# Altium PCB PCB_meu1oarm_2022-08-20.pcbdoc (part 2 of 2)
Units mil, origin at the board's own origin, x right, y up, seen from the top; angles counter-clockwise.
Board outline 4310.32 x 3211.34 mil, 2 copper layers (Top Layer, Bottom Layer); 105 components, 150 nets, 526 pads, 319 vias.
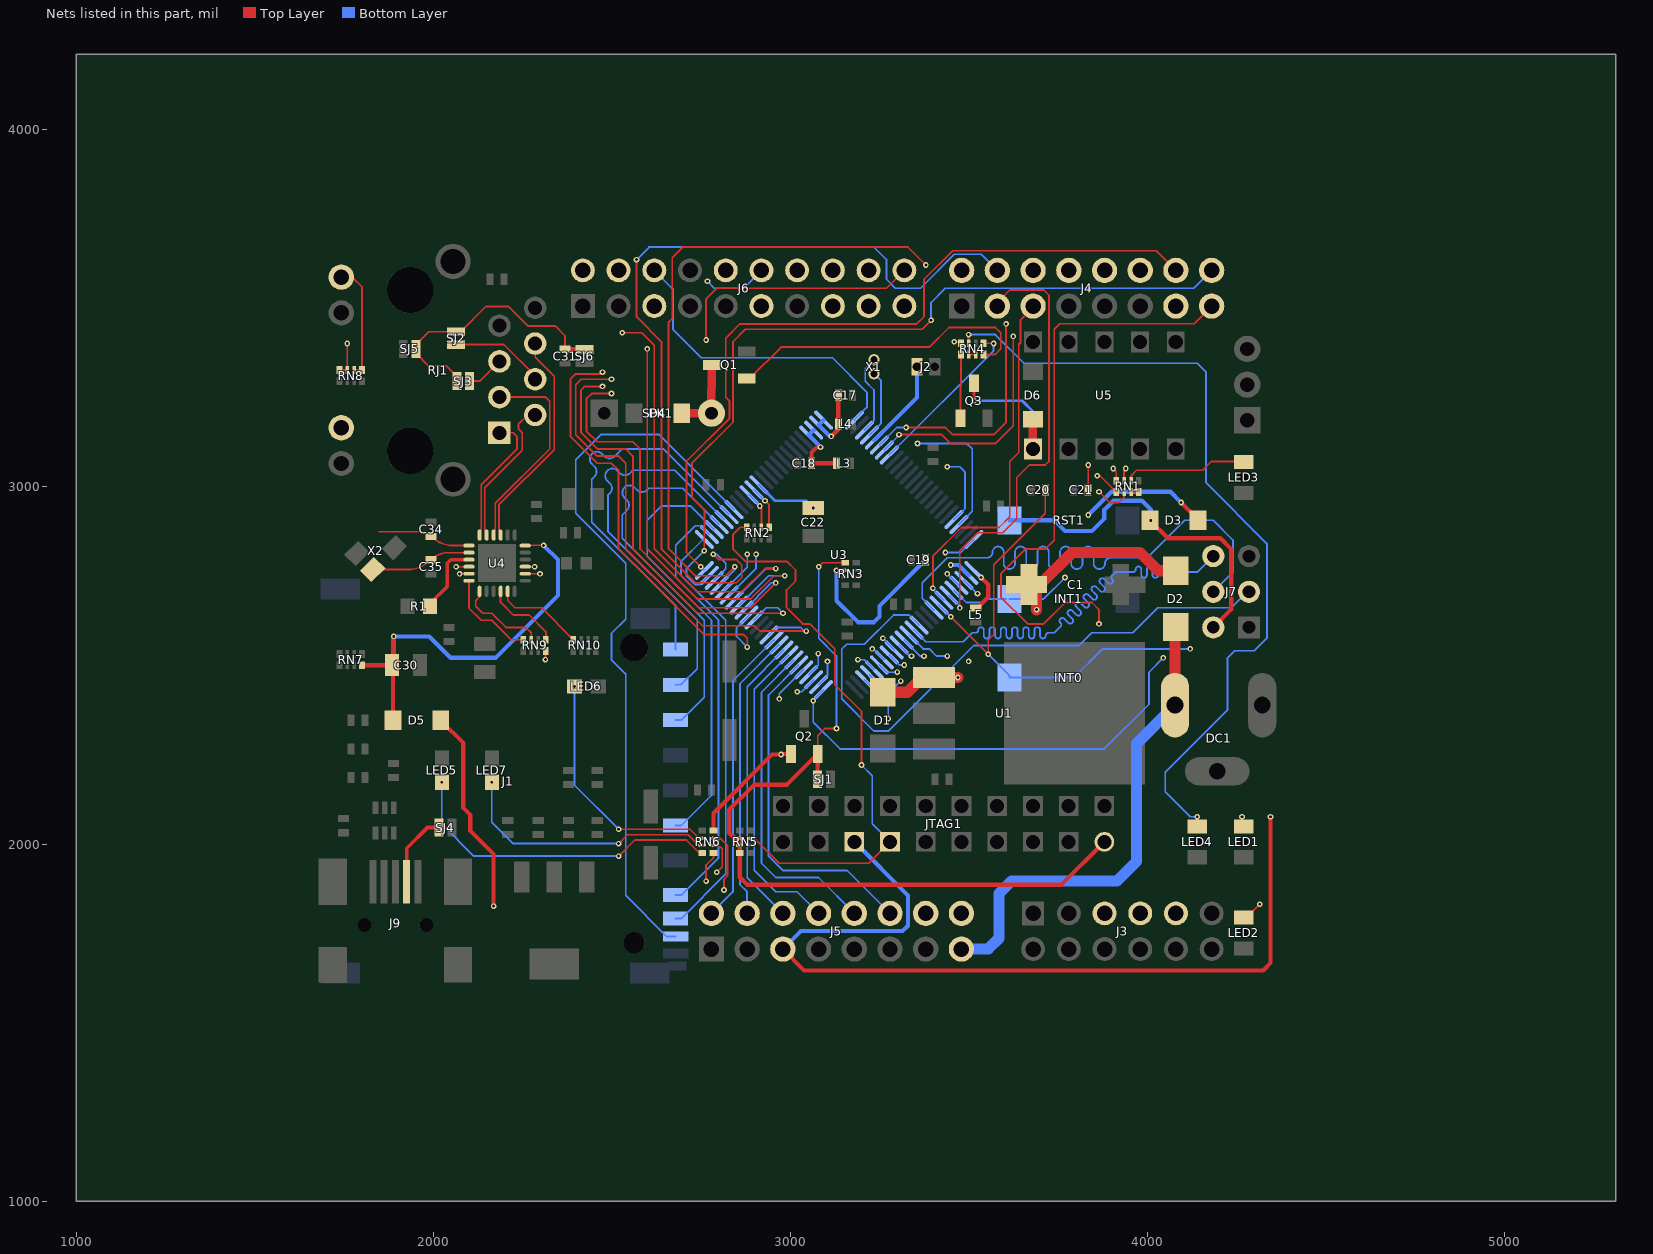
[diagram p2: the nets of this part, all layers, seen from the top]

## Via types
v1: diameter 15.75, hole 7.87, Top Layer to Bottom Layer, tented both sides, 310 vias
v2: diameter 23.62, hole 11.81, Top Layer to Bottom Layer, tented both sides, 7 vias
v3: diameter 24, hole 12, Top Layer to Bottom Layer, tented both sides, 2 vias

## Nets (pads, with @x,y where several pads share a name; then routed paths per layer and width w, separated by ;. In a path a pad name is that pad's centre, name@x,y a point inside that pad or via, vN(x,y) a via of type N, cw(c..) or ccw(c..) an arc to the next point about the centre after c; other vN are vias at no path point) (continued)
PTA16: U3.46 U4.20 | length 2069.4
  Top Layer w5: U4.20@2257.07,2756.84 v1(2298.47,2756.34)
  Mid-Layer 1 w5: v1(2298.47,2756.34) 2638.47,2756.34 2660.64,2778.52 ccw(c2655.08,2784.09) 2660.65,2789.66 cw(c2666.22,2795.22) 2671.78,2800.79 2677.35,2795.23 2682.92,2789.66 ccw(c2688.48,2795.24) 2694.05,2800.79 2688.49,2806.36 2682.92,2811.93 cw(c2688.5,2817.49) 2694.05,2823.06 2699.62,2817.5 ; 2699.63,2817.5 2705.19,2811.93 ccw(c2710.75,2817.51) 2716.32,2823.06 ; 2716.32,2845.34 ccw(c2710.76,2839.77) 2705.19,2834.2 2710.76,2828.63 2716.33,2823.06 ; 2716.33,2845.34 2721.89,2839.77 2727.46,2834.2 ccw(c2733.02,2839.78) 2738.6,2845.34 2733.03,2850.9 2727.46,2856.47 cw(c2733.04,2862.03) 2738.6,2867.61 2744.16,2862.04 2749.73,2856.47 ccw(c2755.29,2862.05) 2760.87,2867.61 2755.3,2873.17 2749.73,2878.74 cw(c2755.31,2884.3) 2760.87,2889.88 2766.43,2884.31 2772.01,2878.74 ccw(c2777.56,2884.32) 2783.14,2889.88 2777.57,2895.44 ; 2777.58,2895.45 2772.01,2901.01 cw(c2777.58,2906.57) 2783.14,2912.15 2788.7,2906.58 2794.28,2901.01 ; 2794.27,2901.01 ccw(c2799.83,2906.59) 2805.41,2912.15 2799.84,2917.72 2794.28,2923.28 ; 2794.27,2923.28 cw(c2799.85,2928.84) 2805.41,2934.42 2810.97,2928.85 2816.55,2923.28 ccw(c2822.1,2928.86) 2827.68,2934.42 2822.11,2939.99 2816.55,2945.55 cw(c2822.12,2951.11) 2827.68,2956.69 2833.25,2951.12 2838.82,2945.55 ccw(c2844.37,2951.13) 2849.95,2956.69 2844.38,2962.26 2838.82,2967.83 cw(c2844.39,2973.38) 2849.95,2978.96 2855.52,2973.39 2861.09,2967.83 ccw(c2866.66,2973.39) 2872.22,2978.96 2866.65,2984.53 2861.09,2990.1 cw(c2866.66,2995.66) 2872.22,3001.23 2877.79,2995.67 2883.36,2990.1 ccw(c2888.92,2995.68) 2894.49,3001.23 2888.92,3006.8 2883.36,3012.37 cw(c2888.94,3017.93) 2894.49,3023.5 2900.06,3017.94 2905.63,3012.37 ccw(c2911.19,3017.95) 2916.76,3023.5 2911.2,3029.07 2905.63,3034.64 cw(c2911.21,3040.2) 2916.77,3045.77 ccw(c2922.33,3051.34) 2927.9,3045.77 ; 2927.9,3045.78 2938.47,3056.34 v1(3438.78,3056.34)
  Bottom Layer w5: v1(3438.78,3056.34) 3473.47,3056.34 3488.47,3041.34 3488.47,2939.56 U3.46@3457.22,2908.32
PTA17: U3.47 U4.21 | length 2193.8
  Top Layer w5: U4.21@2257.07,2776.54 v1(2283.47,2776.34)
  Mid-Layer 1 w5: v1(2283.47,2776.34) 2343.47,2836.34 2346.51,2836.34 2588.47,2836.34 2595.64,2843.52 ccw(c2590.08,2849.09) 2595.65,2854.66 cw(c2601.23,2860.22) 2606.78,2865.79 2612.35,2860.23 2617.92,2854.66 ccw(c2623.48,2860.24) 2629.05,2865.79 2623.49,2871.36 2617.92,2876.93 cw(c2623.5,2882.49) 2629.06,2888.06 2634.62,2882.5 ; 2634.63,2882.5 2640.19,2876.93 ccw(c2645.75,2882.51) 2651.33,2888.07 2645.76,2893.63 2640.19,2899.2 cw(c2645.77,2904.76) 2651.33,2910.34 2656.89,2904.77 2662.46,2899.2 ccw(c2668.02,2904.78) 2673.6,2910.34 2668.03,2915.9 2662.46,2921.47 cw(c2668.03,2927.04) 2673.6,2932.61 2679.16,2927.04 2684.74,2921.47 ccw(c2690.29,2927.05) 2695.87,2932.61 2690.3,2938.18 2684.74,2943.74 cw(c2690.31,2949.3) 2695.87,2954.88 2701.43,2949.31 2707.01,2943.74 ccw(c2712.56,2949.32) 2718.14,2954.88 2712.57,2960.45 ; 2712.58,2960.45 2707.01,2966.01 cw(c2712.58,2971.57) 2718.14,2977.15 2723.71,2971.58 2729.28,2966.01 ; 2729.27,2966.01 ccw(c2734.83,2971.59) 2740.41,2977.15 2734.84,2982.72 2729.28,2988.29 cw(c2734.85,2993.84) 2740.41,2999.42 2745.98,2993.85 2751.55,2988.29 ccw(c2757.1,2993.86) 2762.68,2999.42 2757.11,3004.99 2751.55,3010.56 cw(c2757.12,3016.11) 2762.68,3021.69 2768.25,3016.12 2773.82,3010.56 ccw(c2779.37,3016.13) 2784.95,3021.69 2779.38,3027.26 2773.82,3032.83 cw(c2779.39,3038.39) 2784.95,3043.96 2790.52,3038.4 ; 2790.53,3038.4 2796.09,3032.83 ccw(c2801.65,3038.4) 2807.22,3043.96 2801.66,3049.53 2796.09,3055.1 cw(c2801.67,3060.66) 2807.22,3066.23 2812.79,3060.67 2818.36,3055.1 ccw(c2823.93,3060.67) 2829.49,3066.23 2823.93,3071.8 ; 2823.92,3071.8 2818.36,3077.37 cw(c2823.94,3082.93) 2829.5,3088.5 2835.06,3082.94 2840.63,3077.37 ccw(c2846.19,3082.95) 2851.77,3088.51 cw(c2857.33,3094.07) 2851.77,3099.64 2873.47,3121.34 3003.76,3121.34 3038.76,3086.34 3188.86,3086.34 3223.86,3121.34 v1(3355.32,3121.34)
  Bottom Layer w5: v1(3355.32,3121.34) 3493.47,3121.34 3508.47,3106.34 3508.47,2931.64 U3.47@3471.16,2894.34
PTA18: RN9.8 U3.50 | length 2140.7
  Top Layer w5: v1(2313.47,2516.34) 2313.47,2539.09 RN9.8@2314.96,2540.59
  Mid-Layer 1 w5: v1(2313.47,2516.34) 2313.47,2566.34 2273.47,2606.34 2188.47,2606.34 2158.47,2576.34 2158.47,2401.34 2298.47,2261.34 2878.47,2261.34 3124.71,2507.59 3124.71,2542.28 3138.77,2556.34 3170.46,2556.34 3173.77,2556.34 3258.76,2641.64 3258.76,2691.34 3285.47,2718.04 3335.16,2718.04 v1(3433.47,2816.34)
  Bottom Layer w5: v1(3433.47,2816.34) 3476.57,2816.34 U3.50@3512.89,2852.64
PTB0: U3.53 U4.10 | length 2289.1
  Top Layer w5: v1(2063.47,2776.34) 2099.39,2776.34 U4.10@2099.59,2776.54
  Mid-Layer 1 w5: v1(2063.47,2776.34) 2038.46,2751.34 2038.46,2416.34 2268.47,2186.34 3068.47,2186.34 3493.76,2611.64 3493.76,2671.64 v1(3523.47,2701.34)
  Bottom Layer w5: U3.53@3485.05,2738.5 3522.22,2701.34 v1(3523.47,2701.34)
PTB1: U3.54 U4.11 | length 2252.8
  Top Layer w5: v1(2073.47,2756.34) U4.11@2099.57,2756.84
  Mid-Layer 1 w5: v1(2073.47,2756.34) 2073.47,2431.34 2283.47,2221.34 2973.47,2221.34 3020.45,2268.32 ccw(c3014.88,2273.89) 3020.44,2279.45 cw(c3026.02,2285.01) 3031.58,2290.59 3037.15,2285.02 3042.71,2279.45 ccw(c3048.27,2285.03) 3053.85,2290.59 3048.28,2296.16 3042.71,2301.72 cw(c3048.29,2307.28) 3053.85,2312.86 3059.42,2307.29 3064.98,2301.72 ccw(c3070.54,2307.3) 3076.12,2312.86 3070.55,2318.43 3064.98,2323.99 cw(c3070.56,2329.55) 3076.12,2335.13 3081.69,2329.56 3087.25,2323.99 ccw(c3092.81,2329.57) 3098.39,2335.13 cw(c3103.96,2340.7) 3098.39,2346.27 3438.47,2686.34 v1(3438.47,2756.34)
  Bottom Layer w5: v1(3438.47,2756.34) U3.54@3471.16,2724.54
PTB2: C21.2 INT1.A J4.10 U3.55 | length 1340.5
  Top Layer w5: C21.2@3833.17,2991.34 v1(3833.47,3061.34)
  Mid-Layer 1 w5: v1(3833.47,3061.34) 3833.47,3560.74 J4.10@3878.97,3606.24
  Mid-Layer 2 w5: v1(3768.47,2746.34) 3768.47,3031.34 3798.47,3061.34 v1(3833.47,3061.34)
  Bottom Layer w5: U3.55@3457.22,2710.66 3491.56,2676.34 3538.47,2676.34 3548.47,2686.34 INT1.A@3602.97,2686.34 ; INT1.A@3613.11,2686.34 3708.47,2686.34 v1(3768.47,2746.34)
PTB3: J4.3 RN4.8 U3.56 | length 1463.3
  Top Layer w5: v1(3458.47,3406.34) 3472.71,3406.34 RN4.8@3476.97,3402.09 ; v1(3473.47,2661.34) 3473.47,2821.34 3523.47,2871.34 3593.47,2871.34 3633.47,2911.34 3633.47,3026.34 3668.47,3061.34 3713.47,3061.34 3723.47,3071.34 3723.47,3536.34 3708.47,3551.34 3613.47,3551.34 3578.96,3516.84 J4.3@3578.97,3506.24
  Mid-Layer 1 w5: v1(3458.47,3406.34) 3458.47,3426.34 3483.47,3451.34 3524.07,3451.34 J4.3@3578.97,3506.24
  Bottom Layer w5: U3.56@3443.3,2696.75 3473.47,2666.59 v1(3473.47,2661.34)
PTB9: J4.5 U3.57 | length 1016.7
  Top Layer w5: v1(3398.47,2716.34) 3398.47,2806.34 3478.47,2886.34 3583.47,2886.34 3613.47,2916.34 3613.47,3071.04 3638.76,3096.34 3638.76,3126.34 3638.76,3401.34 3643.47,3401.34 3643.47,3466.34 3678.96,3501.84 J4.5@3678.97,3506.24
  Bottom Layer w5: v1(3398.47,2716.34) 3398.47,2713.75 U3.57@3429.38,2682.83
PTB10: C20.2 INT0.A J4.12 U3.58 | length 2519.5
  Top Layer w5: v1(3448.47,2636.34) v1(3553.47,2531.34) 3553.47,2571.34 3568.76,2586.64 3568.76,2781.64 3713.17,2926.04 C20.2@3713.17,2991.34
  Mid-Layer 1 w5: J4.12@3978.97,3606.24 4023.86,3561.34 4098.47,3561.34 4128.76,3531.04 4128.76,3466.34 4118.76,3456.94 v1(4118.77,2546.34)
  Bottom Layer w5: U3.58@3415.46,2668.91 v1(3448.47,2636.34) ; v1(3553.47,2531.34) 3613.11,2471.69 INT0.A@3613.11,2466.34 3793.47,2466.34 3873.47,2546.34 v1(4118.77,2546.34)
PTB11: J7.4 U3.59 | length 1704.3
  Bottom Layer w5: U3.59@3401.57,2654.94 3368.47,2688.04 3368.47,2731.34 3438.47,2801.34 3549.47,2801.34 ; 3549.49,2801.34 ccw(c3549.49,2817.09) 3565.24,2817.09 cw(c3580.99,2817.09) 3596.74,2817.09 3596.74,2801.34 3596.74,2785.59 ccw(c3612.49,2785.59) 3628.24,2785.59 3628.24,2801.34 3628.24,2817.09 cw(c3643.98,2817.09) 3659.73,2817.09 3659.73,2801.34 3659.73,2785.59 ccw(c3675.48,2785.59) 3691.23,2785.59 3691.23,2801.34 ; 3691.22,2801.34 3691.23,2817.09 cw(c3706.98,2817.09) 3722.72,2817.09 3722.72,2801.34 3722.72,2785.59 ccw(c3738.47,2785.59) 3754.22,2785.59 3754.22,2801.34 3754.22,2817.09 cw(c3769.97,2817.09) 3785.72,2817.09 3785.72,2801.34 3785.72,2785.59 ccw(c3801.46,2785.59) 3817.21,2785.59 3817.21,2801.34 3817.21,2817.09 cw(c3832.96,2817.09) 3848.71,2817.09 3848.71,2801.34 3848.71,2785.59 ccw(c3864.46,2785.59) 3880.2,2785.59 cw(c3895.95,2785.59) 3895.95,2801.34 3998.47,2801.34 4103.47,2906.34 4183.47,2906.34 4238.47,2851.34 4238.47,2761.34 J7.4@4183.47,2706.34
PTB16: J7.3 U3.62 | length 1745.9
  Bottom Layer w5: U3.62@3359.78,2613.23 3331.66,2641.34 3288.47,2641.34 3206.66,2559.54 3156.97,2559.54 3143.47,2546.04 3143.47,2406.34 3233.47,2316.34 3273.47,2316.34 3513.47,2556.34 3808.47,2556.34 3843.47,2591.34 3958.47,2591.34 4028.47,2661.34 4233.47,2661.34 4278.47,2706.34 J7.3@4283.47,2706.34
PTB17: J7.6 U3.63 | length 1746.5
  Bottom Layer w5: U3.63@3345.86,2599.31 3378.47,2566.34 3483.47,2566.34 3508.47,2591.34 3517.45,2591.34 ccw(c3517.45,2599.21) 3525.32,2599.21 cw(c3533.2,2599.21) 3541.07,2599.21 3541.08,2591.34 ; 3541.07,2591.34 3541.07,2583.47 ccw(c3548.95,2583.47) 3556.82,2583.47 3556.82,2591.34 3556.82,2599.21 cw(c3564.69,2599.21) 3572.57,2599.21 3572.57,2591.34 3572.57,2583.47 ccw(c3580.44,2583.47) 3588.31,2583.47 3588.31,2591.34 3588.31,2599.21 cw(c3596.19,2599.21) 3604.06,2599.21 3604.07,2591.34 3604.06,2583.47 ccw(c3611.94,2583.47) 3619.81,2583.47 3619.81,2591.34 3619.81,2599.21 cw(c3627.68,2599.21) 3635.56,2599.21 3635.55,2591.34 3635.56,2583.47 ccw(c3643.43,2583.47) 3651.31,2583.47 3651.31,2591.34 3651.31,2599.21 cw(c3659.18,2599.21) 3667.05,2599.21 3667.05,2591.34 3667.05,2583.47 ccw(c3674.93,2583.47) 3682.8,2583.47 3682.81,2591.34 3682.8,2599.21 cw(c3690.68,2599.21) 3698.55,2599.21 3698.55,2591.34 3698.55,2583.47 ccw(c3706.43,2583.47) 3714.3,2583.47 cw(c3722.17,2583.47) 3722.18,2591.34 3738.47,2591.34 3755.55,2608.43 ccw(c3749.99,2614) 3755.55,2619.56 cw(c3761.13,2625.12) 3766.69,2630.7 3772.25,2625.13 3777.82,2619.56 ccw(c3783.38,2625.14) 3788.96,2630.7 3783.39,2636.27 3777.82,2641.83 cw(c3783.4,2647.39) 3788.96,2652.97 3794.53,2647.4 3800.1,2641.83 ccw(c3805.65,2647.41) 3811.23,2652.97 3805.66,2658.54 3800.1,2664.11 cw(c3805.67,2669.66) 3811.23,2675.24 3816.8,2669.67 3822.37,2664.11 ccw(c3827.93,2669.67) 3833.5,2675.24 3827.93,2680.81 3822.37,2686.38 cw(c3827.94,2691.93) 3833.5,2697.51 3839.07,2691.94 3844.64,2686.38 ccw(c3850.2,2691.95) 3855.77,2697.51 ; 3855.77,2719.78 ccw(c3850.21,2714.21) 3844.64,2708.65 3850.2,2703.08 3855.78,2697.51 ; 3855.78,2719.78 3861.34,2714.22 3866.91,2708.65 ccw(c3872.47,2714.23) 3878.04,2719.78 3872.47,2725.35 3866.91,2730.92 cw(c3872.49,2736.48) 3878.04,2742.05 3883.61,2736.49 3889.18,2730.92 ccw(c3894.74,2736.5) 3900.31,2742.05 cw(c3905.88,2747.62) 3900.31,2753.19 3908.47,2761.34 3958.18,2761.34 ccw(c3958.17,2769.21) 3966.05,2769.21 cw(c3973.92,2769.21) 3981.79,2769.21 3981.8,2761.34 3981.8,2753.47 ccw(c3989.67,2753.47) 3997.54,2753.47 3997.54,2761.34 3997.54,2769.21 cw(c4005.42,2769.21) 4013.29,2769.21 4013.29,2761.34 4013.29,2753.47 ccw(c4021.16,2753.47) 4029.04,2753.47 4029.04,2761.34 4029.04,2769.21 cw(c4036.91,2769.21) 4044.79,2769.21 4044.79,2761.34 4044.79,2753.47 ccw(c4052.66,2753.47) 4060.53,2753.47 4060.53,2761.34 4060.53,2769.21 cw(c4068.41,2769.21) 4076.28,2769.21 4076.28,2761.34 4076.28,2753.47 ccw(c4084.16,2753.47) 4092.03,2753.47 4092.03,2761.34 4092.03,2769.21 cw(c4099.9,2769.21) 4107.78,2769.21 ccw(c4115.65,2769.21) 4115.65,2761.34 4138.47,2761.34 J7.6@4183.47,2806.34
PTB18: RN6.2 U3.64 | length 1392.8
  Top Layer w5: RN6.2@2784.22,1996.5 2798.3,1996.5 2808.47,1986.34 2808.47,1936.34 v1(2793.47,1921.34)
  Mid-Layer 1 w5: v1(2793.47,1921.34) 3288.47,1921.34 3328.47,1961.34 3328.47,2416.34 v1(3438.47,2526.34)
  Bottom Layer w5: U3.64@3331.95,2585.39 3370.99,2546.34 3388.47,2546.34 3408.47,2526.34 v1(3438.47,2526.34)
PTB19: RN6.3 U3.65 | length 1673.2
  Top Layer w5: RN6.3@2784.22,2016.18 2803.63,2016.18 2823.47,1996.34 2823.47,1911.34 2813.47,1901.34 v1(2813.47,1871.34)
  Mid-Layer 1 w5: v1(2813.47,1871.34) 2838.47,1896.34 3368.47,1896.34 3428.47,1956.34 3428.47,2476.34 3463.47,2511.34 v1(3498.47,2511.34)
  Mid-Layer 2 w5: v1(3373.47,2526.34) 3373.47,2546.34 3383.47,2556.34 3453.47,2556.34 v1(3498.47,2511.34)
  Bottom Layer w5: U3.65@3318.02,2571.47 3363.17,2526.34 v1(3373.47,2526.34)
PTB20: J3.7 U3.66 | length 1548.7
  Mid-Layer 2 w5: v1(3338.47,2526.34) 3378.47,2486.34 3648.47,2486.34 3798.47,2636.34 3873.47,2636.34 3945.47,2564.34 3945.47,1872.44 J3.7@3879.01,1806.03
  Bottom Layer w5: U3.66@3304.09,2557.55 3335.31,2526.34 v1(3338.47,2526.34)
PTB21: J3.5 U3.67 | length 1604.2
  Mid-Layer 2 w5: v1(3258.47,2576.34) 3698.47,2576.34 3783.47,2661.34 3883.47,2661.34 3972.77,2572.04 3972.77,1806.04 J3.5@3979.01,1806.03
  Bottom Layer w5: v1(3258.47,2576.34) U3.67@3290.18,2543.63
PTB22: J3.3 U3.68 | length 1834.4
  Mid-Layer 2 w5: v1(3318.47,2501.34) 3303.47,2501.34 3238.47,2566.34 3238.47,2591.34 3253.47,2606.34 3693.47,2606.34 3773.47,2686.34 3888.47,2686.34 4000.07,2574.74 4000.07,1885.04 J3.3@4079.01,1806.03
  Bottom Layer w5: U3.68@3276.26,2529.71 3304.63,2501.34 v1(3318.47,2501.34)
PTB23: RN6.1 U3.69 | length 1225.2
  Top Layer w5: v1(2763.47,1896.34) 2763.47,1941.34 2784.22,1962.09 RN6.1@2784.22,1974.84
  Mid-Layer 2 w5: v1(2763.47,1896.34) 3188.47,1896.34 3228.47,1936.34 v1(3228.47,2546.34)
  Bottom Layer w5: v1(3228.47,2546.34) 3231.8,2546.34 U3.69@3262.34,2515.79
PTC0: J4.15 U3.70 | length 2407.1
  Top Layer w5: v1(3863.47,2616.34) 3863.56,2656.54 3843.86,2676.34 3768.76,2676.34 3708.76,2616.34 3663.76,2616.34 3588.76,2691.34 3588.76,2756.34 3658.76,2826.34 3713.76,2826.34 3738.47,2851.04 3738.47,3441.34 3753.47,3456.34 4129.96,3457.24 J4.15@4178.97,3506.24
  Mid-Layer 2 w5: v1(3298.47,2481.34) 3358.47,2481.34 3403.47,2436.34 3648.47,2436.34 3828.47,2616.34 v1(3863.47,2616.34)
  Bottom Layer w5: U3.70@3248.42,2501.87 3268.96,2481.34 v1(3298.47,2481.34)
PTC1: J6.5 U3.71 | length 1807
  Mid-Layer 2 w5: J6.5@2618.47,3506.24 2618.47,3436.34 2638.47,3416.34 2638.47,3346.34 2618.47,3326.34 2618.47,3166.34 2698.47,3086.34 2878.47,3086.34 3008.47,2956.34 3008.47,2716.34 2953.47,2661.34 2953.47,2471.34 2998.47,2426.34 2998.47,2401.34 3033.47,2366.34 3128.47,2366.34 3188.47,2426.34 v1(3188.47,2516.34)
  Bottom Layer w5: v1(3188.47,2516.34) 3206.12,2516.34 U3.71@3234.51,2487.95
PTC2: J5.16 U3.72 | length 899.4
  Mid-Layer 2 w5: v1(3308.47,2456.34) 3358.47,2456.34 3528.76,2286.04 3528.76,1856.44 J5.16@3478.36,1806.04
  Bottom Layer w5: U3.72@3220.58,2474.03 3253.26,2441.34 3293.47,2441.34 v1(3308.47,2456.34)
PTC3: J5.14 U3.73 | length 745.9
  Mid-Layer 2 w5: v1(3273.47,2351.34) 3308.86,2351.34 3327.87,2332.33 3327.87,1856.53 J5.14@3378.36,1806.04
  Bottom Layer w5: U3.73@3206.67,2460.12 3273.47,2393.33 v1(3273.47,2351.34)
PTC4: J4.13 U3.76 | length 2284.4
  Mid-Layer 1 w5: v1(4043.47,2521.34) 4043.47,3011.34 4028.47,3026.34 4028.47,3455.74 J4.13@4078.97,3506.24
  Bottom Layer w5: U3.76@3092.53,2432.28 3063.47,2403.21 v1(3063.47,2401.34) 3063.47,2341.34 3138.47,2266.34 3878.47,2266.34 4003.47,2391.34 4003.47,2481.34 v1(4043.47,2521.34)
PTC5: J6.10 U3.77 | length 1640.6
  Mid-Layer 2 w5: J6.10@2818.47,3606.24 2868.47,3556.24 2868.47,3446.34 2919.87,3394.94 ccw(c2925.43,3400.51) 2931,3394.94 cw(c2936.56,3389.36) 2942.14,3383.8 2936.57,3378.24 2931,3372.67 ccw(c2936.58,3367.11) 2942.14,3361.53 2947.7,3367.1 2953.27,3372.67 cw(c2958.83,3367.09) 2964.41,3361.53 2958.84,3355.97 2953.27,3350.4 ccw(c2958.85,3344.84) 2964.41,3339.26 2969.97,3344.83 2975.54,3350.4 cw(c2981.1,3344.82) 2986.68,3339.26 2981.11,3333.7 2975.54,3328.13 ccw(c2981.11,3322.56) 2986.68,3316.99 2992.24,3322.56 2997.82,3328.13 cw(c3003.37,3322.55) 3008.95,3316.99 3003.38,3311.42 2997.82,3305.86 ccw(c3003.39,3300.3) 3008.95,3294.72 3014.51,3300.29 3020.09,3305.86 cw(c3025.64,3300.28) 3031.22,3294.72 3025.65,3289.15 3020.09,3283.59 ccw(c3025.66,3278.03) 3031.22,3272.45 3036.79,3278.02 3042.36,3283.59 cw(c3047.91,3278.01) 3053.49,3272.45 3047.92,3266.88 3042.36,3261.31 ccw(c3047.93,3255.76) 3053.49,3250.18 3059.06,3255.75 3064.63,3261.31 cw(c3070.18,3255.74) 3075.76,3250.18 ccw(c3081.33,3244.61) 3075.76,3239.04 3103.47,3211.34 3103.47,3184.84 3102.26,3184.84 3058.76,3141.34 3058.76,3106.34 3103.47,3061.64 v1(3103.47,2511.34)
  Bottom Layer w5: U3.77@3078.62,2446.19 3103.47,2471.04 v1(3103.47,2511.34)
PTC6: J6.14 U3.78 | length 1648.4
  Mid-Layer 2 w5: v1(3018.47,2426.34) 3018.47,2406.34 3043.47,2381.34 3093.47,2381.34 3118.76,2406.64 3118.76,2481.34 3143.76,2506.34 3143.76,2531.34 3153.37,2540.94 3178.37,2540.94 3193.47,2556.04 3193.47,2616.34 3168.47,2641.34 3168.47,3102.24 3183.76,3117.64 3183.76,3176.34 3168.47,3191.64 3168.47,3361.34 3150.27,3379.54 cw(c3155.82,3385.12) 3150.25,3390.69 ccw(c3144.67,3396.25) 3139.11,3401.83 3133.54,3396.26 3127.98,3390.69 cw(c3122.42,3396.27) 3116.84,3401.83 3122.41,3407.39 3127.98,3412.96 ccw(c3122.4,3418.52) 3116.84,3424.1 3111.27,3418.53 3105.71,3412.96 cw(c3100.15,3418.54) 3094.57,3424.1 3100.14,3429.67 3105.71,3435.23 ccw(c3100.13,3440.79) 3094.57,3446.37 cw(c3089,3451.94) 3083.43,3446.37 3068.47,3461.34 3068.47,3556.24 J6.14@3018.47,3606.24
  Bottom Layer w5: v1(3018.47,2426.34) 3030.92,2426.34 U3.78@3064.7,2460.12
PTC7: J6.12 U3.79 | length 1561.9
  Mid-Layer 2 w5: v1(2767.36,3575.55) 2767.37,3465.74 2790.16,3442.94 ; 2790.17,3442.9 ccw(c2795.74,3448.47) 2801.31,3442.9 cw(c2806.88,3437.33) 2812.44,3431.76 2806.88,3426.19 ; 2806.87,3426.19 2801.31,3420.63 ccw(c2806.88,3415.06) 2812.44,3409.49 2818.01,3415.06 2823.58,3420.63 cw(c2829.15,3415.06) 2834.72,3409.49 2829.15,3403.92 2823.58,3398.35 ccw(c2829.2,3392.84) 2834.72,3387.22 2840.28,3392.79 2845.85,3398.35 cw(c2851.41,3392.78) 2856.99,3387.22 2851.42,3381.65 2845.85,3376.08 ccw(c2851.47,3370.57) 2856.99,3364.95 cw(c2862.55,3359.38) 2868.12,3364.95 ; 2868.17,3364.94 3027.77,3205.34 3027.77,2762.34 3073.76,2716.34 3073.76,2536.74 v1@3077.37,2533.14
  Bottom Layer w5: v1@2767.37,3575.54 2786.57,3556.34 2868.56,3556.34 J6.12@2918.47,3606.24 ; U3.79@3050.78,2474.03 3077.36,2500.61 v1(3077.36,2533.15)
PTC8: J6.16 U3.80 | length 1640.8
  Mid-Layer 2 w5: v1(2968.47,2406.34) 3028.47,2346.34 3153.47,2346.34 3208.47,2401.34 3208.47,3411.34 3168.47,3451.34 3168.47,3556.24 J6.16@3118.47,3606.24
  Bottom Layer w5: v1(2968.47,2406.34) 2968.47,2421.34 3035.09,2487.96 U3.80@3036.86,2487.95
PTC9: J5.12 U3.81 | length 976.8
  Bottom Layer w5: U3.81@3022.94,2501.87 2938.47,2417.39 2938.47,1966.34 2978.47,1926.34 3158.07,1926.34 J5.12@3278.36,1806.04
PTC10: J5.10 U3.82 | length 925
  Bottom Layer w5: U3.82@3009.07,2515.84 2918.47,2425.24 2918.47,1946.34 2958.47,1906.34 3078.07,1906.34 J5.10@3178.36,1806.04
PTC11: J5.8 U3.83 | length 873.1
  Bottom Layer w5: U3.83@2995.1,2529.71 2898.47,2433.04 2898.47,1926.34 2958.47,1866.34 3018.07,1866.34 J5.8@3078.36,1806.04
PTC12: J5.6 U3.84 | length 821.5
  Bottom Layer w5: J5.6@2978.36,1806.04 2878.47,1905.94 2878.47,2440.94 U3.84@2981.18,2543.63
PTC13: J5.4 U3.85 | length 804.8
  Bottom Layer w5: J5.4@2878.36,1806.04 2878.37,1866.44 2858.47,1886.44 2858.47,2448.74 U3.85@2967.26,2557.55
PTC14: J5.2 U3.86 | length 837.9
  Bottom Layer w5: J5.2@2778.36,1806.04 2838.47,1866.14 2838.47,2456.64 U3.86@2953.37,2571.44
PTC15: J6.15 U3.87 | length 2215.8
  Top Layer w5: v1(2498.47,3301.34) 2413.47,3301.34 2398.47,3286.34 2398.47,3146.34 2458.47,3086.34 2518.47,3086.34 2538.47,3066.34 2538.47,2826.34 2753.37,2611.44 2898.76,2611.34 2913.66,2596.44 v1(3043.78,2596.34)
  Mid-Layer 1 w5: v1(2498.47,3301.34) 2528.47,3301.34 2558.47,3331.34 2558.47,3426.34 2578.47,3446.34 2653.47,3446.34 2668.47,3461.34 2668.47,3531.34 2688.47,3551.34 3073.37,3551.34 J6.15@3118.47,3506.24
  Bottom Layer w5: U3.87@2939.47,2585.44 2960.36,2606.34 3028.37,2606.34 3038.37,2596.34 v1(3043.78,2596.34)
PTC16: J6.17 RN1.1 U3.90 | length 3436.6
  Top Layer w5: v1(2473.47,3281.34) 2423.47,3281.34 2413.47,3271.34 2413.47,3151.34 2458.47,3106.34 2538.47,3106.34 2558.47,3086.34 2558.47,2826.34 2738.47,2646.34 v1(2978.78,2646.34) ; v1(3858.47,3031.34) 3866.21,3031.34 RN1.1@3911.97,2985.59
  Mid-Layer 1 w5: v1(2473.47,3281.34) 2443.47,3281.34 2413.47,3251.34 2413.47,3151.34 2443.47,3121.34 2568.47,3121.34 2838.47,3391.34 3103.56,3391.34 J6.17@3218.47,3506.24 3273.56,3561.34 3363.47,3561.34 3423.47,3501.34 3423.47,3406.34 3593.47,3236.34 3668.47,3236.34 3738.47,3166.34 3738.47,3056.34 3763.47,3031.34 v1(3858.47,3031.34)
  Bottom Layer w5: U3.90@2897.66,2627.15 2931.85,2661.34 2963.77,2661.34 v1(2978.78,2646.34)
PTC17: J6.19 RN1.2 U3.91 | length 3626.9
  Top Layer w5: v1(2473.47,3321.34) 2468.47,3316.34 2398.47,3316.34 2383.47,3301.34 2383.47,3141.34 2458.47,3066.34 2498.47,3066.34 2518.47,3046.34 2518.47,2826.34 2758.47,2586.34 2868.47,2586.34 2878.47,2576.34 v1(2878.47,2551.34) ; v1(3863.47,2986.34) 3893.47,2956.34 3918.47,2956.34 3933.66,2971.54 RN1.2@3933.66,2985.64
  Mid-Layer 1 w5: v1(2473.47,3321.34) 2443.47,3321.34 2383.47,3261.34 2383.47,3141.34 2433.47,3091.34 2573.47,3091.34 2833.47,3351.34 3163.56,3351.34 J6.19@3318.47,3506.24 3318.47,3441.34 3363.47,3396.34 3403.47,3396.34 3583.47,3216.34 3658.47,3216.34 3718.47,3156.34 3718.47,3026.34 3793.47,2951.34 3828.47,2951.34 v1(3863.47,2986.34)
  Bottom Layer w5: v1(2878.47,2551.34) 2848.47,2581.34 2848.47,2605.8 U3.91@2883.74,2641.07
PTC18: J6.11 U3.92 | length 1736
  Top Layer w5: v1(2498.47,3261.34) 2443.47,3261.34 2428.47,3246.34 2428.47,3156.34 2458.47,3126.34 2558.47,3126.34 2578.47,3106.34 2578.47,2826.34 2743.47,2661.34 2888.47,2661.34 v1(2958.47,2731.34)
  Mid-Layer 1 w5: v1(2498.47,3261.34) 2673.56,3261.34 J6.11@2918.47,3506.24
  Bottom Layer w5: U3.92@2869.82,2654.99 2946.18,2731.34 v1(2958.47,2731.34)
PTD0: J6.20 U3.93 | length 2070.1
  Top Layer w5: v1(2598.47,3386.34) 2598.47,2826.34 2738.47,2686.34 2888.47,2686.34 2953.47,2751.34 v1(2983.47,2751.34) ; v1(2763.47,3411.34) 2763.47,3526.34 2793.47,3556.34 3268.56,3556.34 J6.20@3318.47,3606.24
  Mid-Layer 1 w5: v1(2598.47,3386.34) 2738.47,3386.34 v1(2763.47,3411.34)
  Bottom Layer w5: U3.93@2855.9,2668.91 2938.34,2751.34 v1(2983.47,2751.34)
PTD1: J6.18 U3.94 | length 2281.9
  Top Layer w5: v1(2528.47,3431.34) 2583.47,3431.34 2618.47,3396.34 2618.47,2826.34 2738.47,2706.34 2863.47,2706.34 2928.47,2771.34 v1(2958.47,2771.34)
  Mid-Layer 1 w5: v1(2528.47,3431.34) 2488.47,3431.34 2473.47,3446.34 2473.47,3636.34 2508.47,3671.34 3153.37,3671.34 J6.18@3218.47,3606.24
  Bottom Layer w5: U3.94@2841.99,2682.83 2930.5,2771.34 v1(2958.47,2771.34)
PTD2: J6.2 U3.95 | length 1307.9
  Mid-Layer 2 w5: J6.2@2418.47,3606.24 2472.17,3552.54 2472.17,3453.35 2539.13,3386.38 2539.13,3014.33 2802.04,2751.42 2881.41,2751.42 2903.47,2773.47 v1(2903.47,2811.34)
  Bottom Layer w5: U3.95@2828.07,2696.75 2903.47,2772.15 v1(2903.47,2811.34)
PTD3: J6.4 U3.96 | length 1071.3
  Mid-Layer 2 w5: J6.4@2518.47,3606.24 2568.86,3555.84 2568.86,3120.94 v1(2878.47,2811.34)
  Bottom Layer w5: U3.96@2814.15,2710.67 2878.47,2774.98 v1(2878.47,2811.34)
PTD4: J4.2 U3.97 | length 1965.1
  Top Layer w5: v1(2843.47,2776.34) 2818.47,2751.34 2733.47,2751.34 2658.47,2826.34 2658.47,3461.34 2668.47,3471.34 2668.47,3641.34 2698.47,3671.34 3328.76,3671.34 v1(3378.78,3621.34)
  Mid-Layer 1 w5: v1(3378.78,3621.34) 3393.86,3606.24 J4.2@3478.97,3606.24
  Bottom Layer w5: U3.97@2800.22,2724.59 2843.47,2767.83 v1(2843.47,2776.34)
PTD5: J4.4 U3.98 | length 2506
  Top Layer w5: v1(2568.78,3636.34) 2568.77,3476.03 2638.47,3406.34 2638.47,2826.34 2733.47,2731.34 2848.47,2731.34 2863.47,2746.34 2863.47,2781.34 2848.47,2796.34 2798.47,2796.34 v1(2783.47,2811.34)
  Bottom Layer w5: v1(2568.78,3636.34) 2603.76,3671.34 3233.47,3671.34 3268.47,3636.34 3268.47,3581.34 3293.47,3556.34 3363.76,3556.34 3458.76,3651.34 3533.86,3651.34 J4.4@3578.97,3606.24 ; v1(2783.47,2811.34) 2793.47,2811.34 2818.47,2786.34 2818.47,2770.66 U3.98@2786.31,2738.5
PTD6: J4.16 U3.99 | length 2275.4
  Top Layer w5: v1(2758.47,2821.34) 2758.76,2936.34 2723.76,2971.34 2723.76,3066.34 2838.76,3181.34 2838.76,3406.64 2873.47,3441.34 3368.47,3441.34 v1(3393.47,3466.34)
  Bottom Layer w5: v1(2758.47,2821.34) 2708.47,2771.34 2708.47,2751.34 2733.47,2726.34 2746.26,2726.34 U3.99@2772.38,2752.43 ; v1(3393.47,3466.34) 3393.47,3516.34 3433.47,3556.34 4129.07,3556.34 J4.16@4178.97,3606.24
PTD7: J4.14 U3.100 | length 2170.9
  Top Layer w5: v1(2748.47,2776.34) 2708.47,2816.34 2708.47,3071.04 2828.76,3191.34 2828.76,3241.04 2818.47,3251.34 2818.47,3416.34 2858.47,3456.34 3353.47,3456.34 3373.47,3476.34 3373.47,3581.04 3453.76,3661.34 4023.86,3661.34 J4.14@4078.97,3606.24
  Bottom Layer w5: v1(2748.47,2776.34) U3.100@2758.47,2766.34
PTE0: J1.8 U3.1 | length 1209.3
  Bottom Layer w5: J1.8@2678.07,1791.34 2693.47,1791.34 2818.47,1916.34 2818.47,2626.34 2693.47,2751.34 2693.47,2791.34 2754.76,2852.64 U3.1@2758.47,2852.64
PTE1: J1.7 U3.2 | length 1215
  Bottom Layer w5: J1.7@2678.07,1857.74 2694.87,1857.74 2798.47,1961.34 2798.47,2626.34 2678.47,2746.34 2678.47,2836.34 2733.47,2891.34 2747.57,2891.34 U3.2@2772.37,2866.54
PTE2: J1.5 U3.3 | length 1211.6
  Bottom Layer w5: J1.5@2678.07,2052.04 2694.16,2052.04 2778.47,2136.34 2778.47,2626.34 2598.47,2806.34 2598.47,2906.34 2638.47,2946.34 2720.47,2946.34 U3.3@2786.36,2880.44
PTE3: J1.2 U3.4 | length 1122.6
  Bottom Layer w5: J1.2@2678.04,2347.61 2694.74,2347.61 2758.47,2411.34 2758.47,2626.34 2528.47,2856.34 2528.47,2921.34 2541.89,2934.77 ccw(c2527.75,2948.91) 2541.89,2963.05 2534.82,2970.12 cw(c2549.02,2984.2) 2563.1,2998.41 2570.18,2991.34 ccw(c2584.32,3005.48) 2598.46,2991.34 2603.47,2996.34 2698.28,2996.34 U3.4@2800.22,2894.39
PTE4: J1.1 U3.5 | length 1145.1
  Bottom Layer w5: J1.1@2678.09,2445.91 2693.03,2445.91 2738.47,2491.34 2738.47,2626.34 2488.47,2876.34 2488.47,2976.34 2493.89,2981.77 ccw(c2479.75,2995.91) 2493.89,3010.05 2486.82,3017.12 cw(c2501.02,3031.2) 2515.1,3045.41 2522.18,3038.34 ccw(c2536.32,3052.48) 2550.46,3038.34 2558.47,3046.34 2676.13,3046.34 U3.5@2814.15,2908.32
PTE5: J1.9 U3.6 | length 1135.4
  Bottom Layer w5: J1.9@2678.04,2544.66 2678.03,2666.77 2443.47,2901.34 2443.47,3021.34 2450.9,3028.77 ccw(c2436.75,3042.91) 2450.89,3057.05 2443.82,3064.12 cw(c2458.02,3078.2) 2472.1,3092.41 2479.18,3085.34 ccw(c2493.32,3099.48) 2507.46,3085.34 2528.47,3106.34 2643.96,3106.34 U3.6@2828.06,2922.23
PTE6: J1.10 U3.7 | length 2058.6
  Bottom Layer w5: J1.10@2678.09,1741.02 2653.76,1741.04 2538.47,1856.34 2538.47,2477.34 2537.46,2477.34 2498.47,2516.34 2498.47,2589.54 2538.47,2629.54 2538.47,2786.34 2398.47,2926.34 2398.47,3076.34 2468.47,3146.34 2631.77,3146.34 U3.7@2841.97,2936.14
PTE24: J4.6 U3.31 | length 854.6
  Top Layer w5: v1(3323.47,3166.34) 3433.47,3166.34 3453.47,3146.34 3568.47,3146.34 3603.47,3181.34 v1(3603.47,3456.34)
  Mid-Layer 1 w5: v1(3603.47,3456.34) 3628.47,3481.34 3628.47,3556.34 J4.6@3678.97,3606.24
  Bottom Layer w5: U3.31@3248.42,3117.11 3297.66,3166.34 v1(3323.47,3166.34)
PTE25: J4.8 U3.32 | length 942.8
  Top Layer w5: v1(3303.47,3146.34) 3423.47,3146.34 3448.47,3121.34 3573.47,3121.34 3623.47,3171.34 v1(3623.47,3421.34)
  Mid-Layer 1 w5: v1(3623.47,3421.34) 3658.47,3456.34 3713.47,3456.34 3733.47,3476.34 3733.47,3556.34 3778.96,3601.84 J4.8@3778.97,3606.24
  Bottom Layer w5: U3.32@3262.34,3103.19 3303.47,3144.31 v1(3303.47,3146.34)
PTE26: RN4.5 U3.33 | length 461.6
  Top Layer w5: RN4.5@3539.96,3402.04 v1(3568.47,3401.34)
  Bottom Layer w5: U3.33@3276.26,3089.27 3568.47,3381.48 v1(3568.47,3401.34)
Q1_1: Q1.1 RN4.4 | length 876
  Top Layer w5: Q1.1@2877.66,3303.94 2886.06,3303.94 2973.47,3391.34 3388.47,3391.34 3443.47,3446.34 3573.47,3446.34 3588.47,3431.34 3588.47,3386.34 3572.77,3370.64 RN4.4@3539.96,3370.59
Q2_1: Q2.1 RN6.4 | length 334.2
  Top Layer w11.81: RN6.4@2784.22,2037.84 2784.22,2086.34 2947.93,2250.81 v1(2973.57,2250.81) 2974.91,2252.14 Q2.1@3001.07,2252.14
Q2E: JTAG1.1 Q2.2 RN3.1 RN5.6 RN5.7 RN5.8 SJ1.1 | length 2335.9
  Top Layer w5: Q2.2@3075.86,2252.14 3075.87,2303.74 3095.57,2323.44 v1(3128.47,2323.41) ; v1(3078.78,2776.34) 3090.27,2787.84 RN3.1@3152.72,2787.84
  Top Layer w11.81: RN5.8@2857.72,1974.84 2857.66,1907.14 2878.47,1886.34 3758.47,1886.34 JTAG1.1@3878.47,2006.34 ; RN5.6@2857.66,2016.14 2843.66,2016.14 2828.47,2031.34 2828.47,2096.34 2898.47,2166.34 2990.07,2166.34 Q2.2@3075.86,2252.14 SJ1.1@3075.47,2181.34 ; RN5.8@2857.72,1974.84 RN5.7@2857.72,1996.5 RN5.6@2857.72,2016.18
  Bottom Layer w5: v1(3078.78,2776.34) 3078.77,2576.03 3128.47,2526.34 v1(3128.47,2323.41)
Q3_3: D6.2 Q3.3 U5.10 | length 414.9
  Top Layer w7.87: v1(3513.47,3241.34) Q3.3@3513.47,3290.54
  Top Layer w23.62: U5.10@3678.47,3106.24 D6.2@3678.47,3189.41
  Bottom Layer w7.87: v1(3513.47,3241.34) 3648.47,3241.34 3678.43,3211.38 U5.10@3678.42,3106.23
Q3B: Q3.1 RN4.1 | length 178.5
  Top Layer w5: Q3.1@3476.07,3192.14 RN4.1@3476.97,3370.59
R1_2: R1.2 U4.9 | length 205.3
  Top Layer w10: R1.2@1989.96,2666.34 1989.96,2672.84 2038.46,2721.34 2038.46,2786.34 2048.34,2796.22 U4.9@2099.59,2796.23
RC: RJ1.5 SJ3.2 | length 106.3
  Top Layer w5: SJ3.2@2101.47,3296.34 2129.96,3296.34 RJ1.5@2184.96,3351.34
REF_CLK: RN9.1 U4.16 | length 214.4
  Top Layer w5: U4.16@2188.18,2707.64 2188.17,2676.63 2223.47,2641.34 2268.47,2641.34 2314.96,2594.84 RN9.1@2314.96,2572.09
RESET_B: C19.2 D3.2 RN3.2 U3.52 | length 1563.7
  Top Layer w11.81: v1(3128.47,2766.18) RN3.2@3152.72,2766.18 ; v1(4093.47,2956.34) 4140.39,2909.41 D3.2@4140.39,2906.34
  Mid-Layer 2 w11.81: v1(3378.47,2796.34) 3433.47,2796.34 v1(3448.47,2781.34) 3678.47,2781.34 3733.47,2726.34 3798.47,2726.34 3833.47,2761.34 v1(3833.47,2921.34)
  Bottom Layer w11.81: v1@3128.47,2766.14 3128.47,2681.34 3188.47,2621.34 3233.47,2621.34 3248.76,2636.64 3248.76,2666.64 v1(3378.47,2796.34) ; v1(3448.47,2781.34) 3470.06,2781.34 U3.52@3498.98,2752.43 ; v1(3833.47,2921.34) 3898.47,2986.34 4063.47,2986.34 v1(4093.47,2956.34)
  other v1: 3128.47,2766.18
RN1_3: RN1.3 RN1.4 | length 21.7
  Top Layer w5: RN1.3@3953.3,2985.59 RN1.4@3974.96,2985.59
RN1_6: LED3.1 RN1.6 | length 346.6
  Top Layer w5: RN1.6@3953.31,3017.09 3953.3,3031.18 3968.47,3046.34 4153.47,3046.34 4178.47,3071.34 4266.78,3071.34 LED3.1@4268.47,3069.65
RN1_7: LED2.1 RN1.7 | length 1471.6
  Top Layer w5: RN1.7@3933.62,3017.09 3933.63,3046.5 v1(3938.47,3051.34) ; LED2.1@4268.66,1794.64 4276.77,1794.64 v1(4313.47,1831.34)
  Mid-Layer 2 w5: v1(3938.47,3051.34) 4038.47,2951.34 4038.47,2676.34 4193.47,2521.34 4193.47,2366.34 4313.47,2246.34 v1(4313.47,1831.34)
RN1_8: LED1.1 RN1.8 | length 1387.2
  Top Layer w5: v1(3903.47,3051.34) 3911.97,3042.84 RN1.8@3911.97,3017.09 ; v1(4263.77,2076.34) 4263.77,2054.34 LED1.1@4268.47,2049.65
  Mid-Layer 2 w5: v1(3903.47,3051.34) 3903.47,2761.34 3978.47,2686.34 3978.47,2646.34 4158.47,2466.34 4158.47,2321.04 4068.47,2231.04 4068.47,2091.64 4103.76,2056.34 4206.36,2056.34 4226.36,2076.34 v1(4263.77,2076.34)
RN4_2: RN4.2 RN4.3 | length 19.7
  Top Layer w5: RN4.2@3498.62,3370.59 RN4.3@3518.3,3370.59
RN4_7: LED4.1 RN4.7 | length 2274.3
  Top Layer w5: v1(3498.47,3426.34) RN4.7@3498.66,3402.04 ; LED4.1@4138.47,2049.65 4138.77,2049.96 v1(4138.77,2076.34)
  Bottom Layer w5: v1(3498.47,3426.34) 3573.47,3426.34 3653.47,3346.34 4138.47,3346.34 4163.47,3321.34 4163.47,3011.34 4333.47,2841.34 4333.47,2576.34 4298.47,2541.34 4243.47,2541.34 4223.47,2521.34 4223.47,2376.04 4048.76,2201.34 4048.76,2146.04 4118.47,2076.34 v1(4138.77,2076.34)
RN6_6: LED6.1 RN6.6 | length 695.8
  Top Layer w5: v1(2518.47,2041.34) 2718.47,2041.34 2743.63,2016.18 RN6.6@2752.72,2016.18
  Bottom Layer w5: v1(2394.97,2441.34) 2394.96,2164.84 v1(2518.47,2041.34)
RN6_7: LED7.1 RN6.7 | length 748.2
  Top Layer w5: v1(2518.47,2001.34) 2543.47,2026.34 2713.47,2026.34 2743.26,1996.54 RN6.7@2752.72,1996.5
  Bottom Layer w5: v1(2163.47,2172.84) 2163.47,2061.34 2223.47,2001.34 v1(2518.47,2001.34)
RN6_8: LED5.1 RN6.8 | length 916.7
  Top Layer w5: v1(2518.47,1966.34) 2563.47,2011.34 2708.47,2011.34 2744.96,1974.84 RN6.8@2752.72,1974.84
  Bottom Layer w5: v1(2023.46,2172.84) 2023.46,2056.34 2113.47,1966.34 v1(2518.47,1966.34)
RN8_1: RJ1.12 RN8.1 RN8.2 | length 323.7
  Top Layer w5: RJ1.12@1742.01,3587.17 1772.63,3587.17 1799.96,3559.84 RN8.1@1799.96,3327.09 RN8.2@1778.31,3327.09
RN8_3: RJ1.10 RN8.3 RN8.4 | length 338.6
  Top Layer w5: RN8.4@1736.97,3327.09 RN8.3@1758.62,3327.09 v1(1758.62,3401.34)
  Mid-Layer 1 w5: RJ1.10@1742.01,3165.51 1742.02,3384.73 v1(1758.62,3401.34)
RST_: D3.1 D5.1 J5.5 J7.2 JTAG1.15 RST1.A | length 5518.7
  Top Layer w11.81: D5.1@2020.39,2346.34 2083.76,2282.94 2083.76,2101.34 2103.36,2081.74 2103.36,2036.74 2168.47,1972.04 v1(2168.47,1826.34) ; J5.5@2978.36,1706.04 3038.07,1646.34 4323.47,1646.34 4343.77,1666.65 v1(4343.77,2076.34) ; D3.1@4006.57,2906.34 4056.57,2856.34 4203.47,2856.34 4233.47,2826.34 4233.47,2656.34 J7.2@4183.47,2606.34
  Mid-Layer 1 w11.81: v1(2168.47,1826.34) 2653.47,1826.34 2723.47,1756.34 2928.07,1756.34 J5.5@2978.36,1706.04 ; J7.2@4183.47,2606.34 4183.47,2371.34 4343.77,2211.03 v1(4343.77,2076.34)
  Bottom Layer w11.81: J5.5@2978.36,1706.04 3028.66,1756.34 3313.47,1756.34 3328.47,1771.34 3328.47,1856.34 JTAG1.15@3178.47,2006.34 ; RST1.A@3613.11,2906.34 3738.47,2906.34 3768.47,2876.34 3843.47,2876.34 3878.47,2911.34 3878.47,2936.04 3903.76,2961.34 3983.47,2961.34 4008.47,2936.34 v1(4008.47,2906.34)
RX+: RJ1.3 U4.4 | length 585.7
  Top Layer w5: U4.4@2168.49,2865.12 2168.47,2875.34 2173.36,2880.24 2173.36,2953.64 2325.86,3106.14 2325.86,3240.04 2314.57,3251.34 RJ1.3@2184.96,3251.34
RX-: RJ1.6 U4.3 | length 624.4
  Top Layer w5: U4.3@2188.18,2865.12 2188.16,2875.34 2183.36,2880.24 2183.36,2949.44 2338.26,3104.34 2338.26,3309.44 2284.96,3362.84 RJ1.6@2284.96,3401.34
RXD0: RN9.3 U4.13 | length 251.2
  Top Layer w5: U4.13@2129.17,2707.64 2129.17,2692.04 2118.47,2681.34 2118.47,2666.34 2138.47,2646.34 2163.47,2646.34 2203.47,2606.34 2258.47,2606.34 2273.66,2591.14 RN9.3@2273.66,2572.04
RXD1: RN9.4 U4.12 | length 265.8
  Top Layer w5: U4.12@2099.59,2737.17 2099.59,2660.21 2133.47,2626.34 2163.47,2626.34 2217.72,2572.09 RN9.4@2251.97,2572.09
RXER: RN10.8 U4.17 | length 255.4
  Top Layer w5: U4.17@2207.86,2707.64 2207.86,2681.94 2228.47,2661.34 2302.82,2661.34 RN10.8@2392.06,2572.1
S$30: 
S$32: 
S$36: 
S$64: 
S$68: 
S$17471: 
SJ2_1: C31.1 SJ2.1 SJ3.1 SJ5.1 SJ6.1 | length 766.8
  Top Layer w5: SJ3.1@2065.47,3296.34 2065.47,3309.44 2035.66,3339.24 1986.07,3339.24 1951.46,3373.84 SJ5.1@1951.46,3386.34 1951.46,3398.94 1986.87,3434.34 SJ2.1@2063.47,3434.34 2076.16,3434.34 2147.26,3505.44 2209.27,3505.44 2263.86,3450.84 2340.66,3450.84 2368.47,3423.14 C31.1@2368.46,3386.03
  Top Layer w11.81: C31.1@2368.46,3386.03 2421.78,3386.02 SJ6.1@2423.47,3384.34
SJ4_2: J9.4 SJ4.2 | length 208.1
  Top Layer w10: J9.4@1924.96,1894.49 1924.96,1987.84 1983.46,2046.34 SJ4.2@2015.46,2046.34
SPK1_2: D4.2 Q1.3 SPK1.2 | length 218.1
  Top Layer w23.62: D4.2@2695.39,3206.34 SPK1.2@2778.47,3206.34 Q1.3@2779.26,3341.34
TC: RJ1.4 SJ2.2 | length 267.3
  Top Layer w5: SJ2.2@2063.47,3398.34 2196.87,3398.74 2284.96,3310.74 RJ1.4@2284.96,3301.34
TDO: JTAG1.13 RN2.8 RN5.3 | length 1632.8
  Top Layer w5: RN2.8@2876.97,2887.04 2859.16,2887.04 2838.47,2866.34 2838.47,2826.34 2873.47,2791.34 2989.67,2791.34 3013.76,2767.24 3013.76,2736.34 2988.76,2711.34 2988.76,2661.34 3033.76,2616.34 3053.76,2616.34 3123.76,2546.34 3123.76,2446.34 3198.47,2371.64 v1(3198.47,2221.34) ; RN5.3@2889.27,2016.14 2898.66,2016.14 2968.47,1946.34 3218.47,1946.34 JTAG1.13@3278.47,2006.34
  Bottom Layer w5: v1(3198.47,2221.34) 3228.47,2191.34 3228.47,2056.34 JTAG1.13@3278.47,2006.34
TX+: RJ1.1 U4.6 | length 373
  Top Layer w5: U4.6@2129.17,2865.14 2129.17,2875.34 2133.97,2880.24 2133.97,3006.04 2234.27,3106.34 ; RJ1.1@2184.96,3151.34 2223.47,3151.34 2234.27,3140.54 2234.27,3106.34 ; 2234.05,3106.11 2234.27,3106.34
TX-: RJ1.2 U4.5 | length 417.4
  Top Layer w5: U4.5@2148.81,2865.12 2148.76,2875.34 2143.97,2880.24 2143.97,2997.74 2248.47,3102.24 2248.47,3151.34 2238.47,3161.34 2238.47,3176.34 2263.47,3201.34 RJ1.2@2284.96,3201.34
U1_1: C1.1 D1.1 D2.1 U1.1 | length 1165.3
  Top Layer w31.5: D1.1@3258.47,2425.04 3327.46,2425.04 3368.76,2466.34 U1.1@3401.47,2466.34 v1(3468.47,2466.34) ; v1(3688.78,2656.34) 3688.77,2705.03 C1.1@3667.47,2726.34 3698.47,2726.34 3788.47,2816.34 3978.47,2816.34 4029.76,2765.04 D2.1@4078.47,2765.04
  Mid-Layer 1 w39.37: v1(3468.47,2466.34) 3653.76,2466.34 3688.76,2501.34 v1(3688.78,2656.34)
U3_10: RN2.6 U3.10 | length 109.9
  Top Layer w5: v1@2918.26,2946.34 v1(2913.47,2946.34) 2918.3,2941.5 RN2.6@2918.31,2887.09
  Bottom Layer w5: U3.10@2883.74,2977.91 2913.47,2948.18 v1(2913.47,2946.34)
U3_11: RN2.5 U3.11 | length 122.4
  Top Layer w5: v1(2928.47,2961.34) 2939.96,2949.84 RN2.5@2939.96,2887.09
  Bottom Layer w5: U3.11@2897.66,2991.83 2928.17,2961.34 v1(2928.47,2961.34)
U3_12: C22.2 U3.12 | length 178.8
  Bottom Layer w7.87: U3.12@2911.57,3005.74 2955.97,2961.34 3042.86,2961.34 v1(3063.47,2940.71)
U3_22: C18.2 L3.1 U3.22 U3.23 | length 198.6
  Top Layer w11.81: v1(3083.78,3111.34) 3073.76,3111.34 3058.76,3096.34 3058.17,3066.34 L3.1@3128.77,3066.34
  Bottom Layer w11.81: U3.23@3064.67,3158.84 U3.22@3050.78,3144.95 v1(3083.78,3111.34)
U3_24: C17.1 L4.1 U3.24 U3.25 | length 191.1
  Top Layer w11.81: v1(3113.78,3141.34) 3133.77,3161.34 L4.1@3133.77,3176.34 C17.1@3133.78,3256.34
  Bottom Layer w11.81: U3.25@3092.53,3186.7 U3.24@3078.62,3172.79 3110.06,3141.34 v1(3113.78,3141.34)
U3_28: U3.28 X1.1 | length 228.8
  Bottom Layer w5: U3.28@3206.66,3158.84 3233.47,3185.64 3233.47,3271.34 3208.76,3296.04 3208.76,3331.34 X1.1@3233.47,3356.03
U3_29: U3.29 X1.2 | length 193.6
  Bottom Layer w5: U3.29@3220.58,3144.95 3253.47,3177.84 3253.47,3296.64 X1.2@3233.47,3316.64
U3_30: J2.1 U3.30 | length 254.7
  Bottom Layer w11.81: U3.30@3234.51,3131.03 3353.86,3250.38 J2.1@3353.86,3336.34
U3_51: L5.2 U3.51 | length 110.8
  Top Layer w11.81: L5.2@3518.47,2661.02 3523.17,2661.04 3553.47,2691.34 3553.47,2726.34 v1(3533.47,2746.34)
U4_24: C30.1 D5.2 RN7.4 U4.24 | length 1170.4
  Top Layer w5: U4.24@2257.07,2835.6 v1(2308.47,2836.34)
  Top Layer w11.81: RN7.4@1799.96,2500.59 1888.78,2500.64 v1(1888.78,2581.34) 1886.53,2579.1 D5.2@1886.54,2346.34
  Bottom Layer w11.81: v1(1888.78,2581.34) 1988.46,2581.34 2048.47,2521.34 2173.47,2521.34 2348.47,2696.34 2348.47,2796.34 v1(2308.47,2836.34)
VCC: D2.2 DC1.1 J5.15 | length 1366.8
  Top Layer w31.5: DC1.1@4076.42,2388.86 4076.42,2605.56 D2.2@4078.47,2607.6
  Bottom Layer w31.5: J5.15@3478.36,1706.04 3553.17,1706.04 3583.47,1736.34 3583.47,1861.34 3618.47,1896.34 3913.47,1896.34 3968.47,1951.34 3968.47,2280.94 DC1.1@4076.46,2388.84
VREF: J6.6 U3.26 | length 895.6
  Bottom Layer w5: J6.6@2618.47,3606.24 2670.57,3554.14 2670.57,3440.94 2750.16,3361.34 3117.26,3361.34 3213.76,3264.84 3213.76,3222.64 3178.86,3187.74 U3.26@3178.86,3186.74
XI: C35.2 U4.8 X2.3 | length 282.3
  Top Layer w5: X2.3@1829.98,2768.49 1926.98,2768.49 ccw(c1926.98,2862.52) C35.2@1993.47,2796.02 cw(c2041.46,2748.03) 2041.46,2815.91 U4.8@2099.59,2815.91
XO: C34.2 U4.7 X2.1 | length 263.2
  Top Layer w5: X2.1@1846.68,2874.28 1962.97,2874.28 cw(c1962.97,2831.16) C34.2@1993.46,2861.66 ccw(c2056.38,2924.56) 2056.38,2835.59 U4.7@2099.59,2835.6
pads on no net: D7.4 J1. J5.1 J9. JTAG1.2 JTAG1.3 JTAG1.11 JTAG1.17 RJ1. RJ1.7 RN2.2 RN2.7 RN3.3 RN3.4 RN3.5 RN3.6 RN7.1 RN7.2 RN7.3 RN7.6 RN7.7 RN7.8 RN10.2 RN10.3 RN10.4 RN10.5 RN10.6 RN10.7 U5.5 U5.6
copper on no net:
  other v1: 1838.78,2416.34 1938.78,2611.34 1838.78,2651.34 4168.77,3411.34
  other v3: 4263.77,3561.34 4338.77,3651.34

## Polygon pours and split planes (outlines as drawn)
GND on Bottom Layer (solid): 1678.78,1611.34 4378.77,1611.34 4378.77,3711.34 2198.78,3711.34 2198.78,3551.34 2278.78,3551.34 2278.78,3011.34 1678.78,3011.34
GND on Mid-Layer 2 (solid): 1678.78,1611.34 4378.77,1611.34 4378.77,3711.34 2198.78,3711.34 2198.78,3551.34 2278.78,3551.34 2278.78,3011.34 1678.78,3011.34
GND on Mid-Layer 1 (solid): 1678.78,1611.34 4378.77,1611.34 4378.77,3711.34 2198.78,3711.34 2198.78,3551.34 2278.78,3551.34 2278.78,3011.34 1678.78,3011.34
GND on Top Layer (solid): 1678.78,1611.34 4378.77,1611.34 4378.77,3711.34 2198.78,3711.34 2198.78,3551.34 2278.78,3551.34 2278.78,3011.34 1678.78,3011.34

## Silkscreen, mask and mechanical layers (free items; w line width, h text height)
Top Overlay:
  text "+9V" at 4013.78,2473.84 h45
  text "PWR" at 4115.97,1931.34 h45 r90
  text "ARM.M4F.120MHz" at 2798.47,1863.84 h45
  text "MK64FX512VLL12" at 3493.47,1863.84 h45
Bottom Overlay:
  text "2021" at 3113.78,3463.84 h45 r180
  text "LED3" at 4315.97,3096.34 h45 r90
  text "ETH" at 1718.78,3008.84 h45 r180
  text "SDMMC" at 2806.28,2561.34 h45 r90
  text "marcoadeoli@outlook.com" at 2778.47,2354.8 h66.93 r180
  text "LED1" at 4315.97,2076.34 h45 r90
  text "PWR" at 4185.97,2071.34 h45 r90
  text "LED2" at 4315.97,1821.34 h45 r90
  text "WP" at 2708.78,1686.34 h40 r180
Bottom Solder:
  region: 2123.78,2841.34 2228.78,2841.34 2228.78,2731.34 2123.78,2731.34

## Text inside footprints (layer, text, board x,y; h text height)
JTAG1: Bottom Overlay "1" at 3973.47,1961.34 h40